# Altium PCB MultiSpikeHoldPCB.PcbDoc
Units mm, origin at the board's own origin, x right, y up, seen from the top; angles counter-clockwise.
Board outline 89.1 x 92.94 mm, 2 copper layers (Top Layer, Bottom Layer), stack 0.071 mm thick; 101 components, 74 nets, 364 pads, 4 vias.
Unrouted connection lines stored in the file: 182.
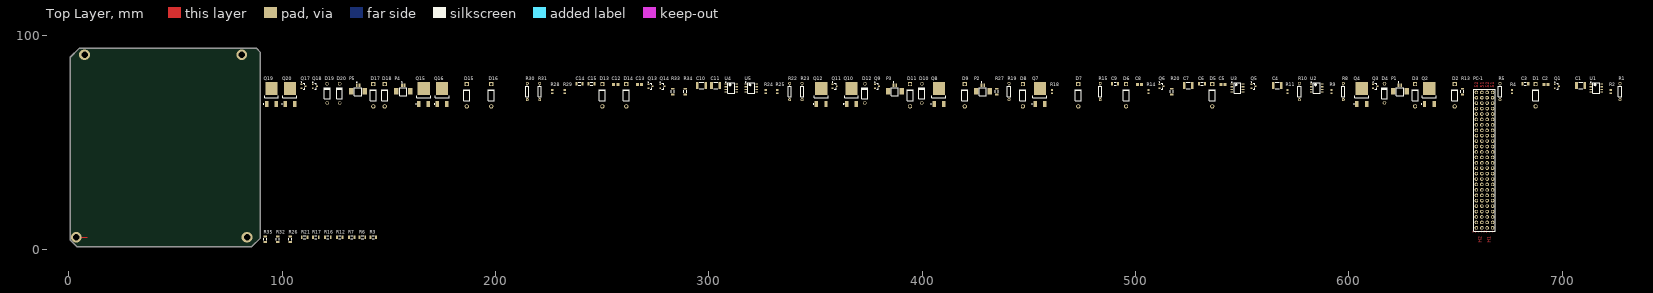
[diagram p0: Top Layer view]
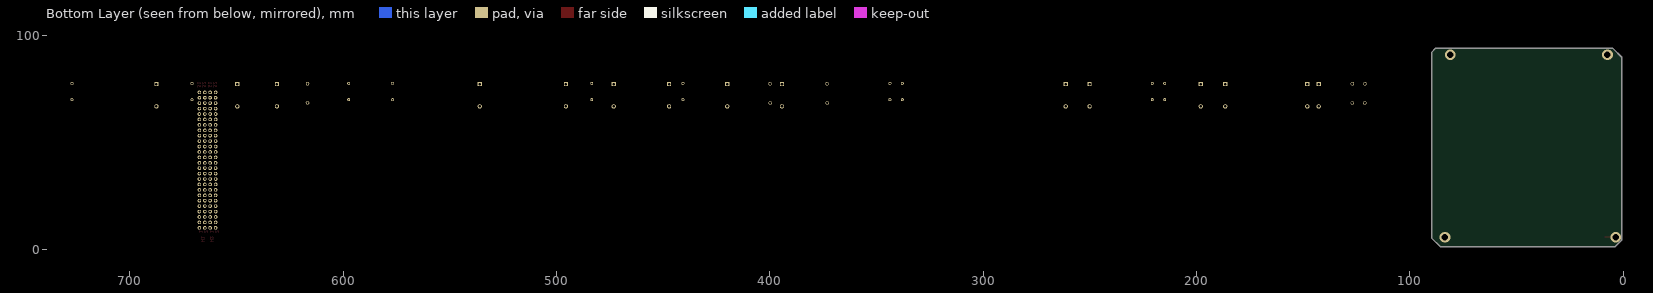
[diagram p1: Bottom Layer view, seen from below]

## Layer stack, top to bottom
Top Solder: solder mask 0.0102, Solder Resist, Dk 3.5
Top Layer: signal copper 0.0356
Bottom Layer: signal copper 0.0356
Bottom Solder: solder mask 0.0102, Solder Resist, Dk 3.5

## Board outline
4.775,94.056 0.686,89.967 0.686,4.216 3.708,1.194 3.734,1.168 84.506,1.168 85.7,1.168 89.789,5.258 89.789,91.821 89.789,92.202 87.884,94.107 87.833,94.056 4.801,94.056

## Design rules (kind name [scope] priority, off if disabled: settings)
Clearance [All] p1: gap=0.254 ignorepadtopadclearanceinfootprint=FALSE except(0: Arc-Hole Track-Hole SMDPad-Hole THPad-Hole Via-Hole Fill-Hole Poly-Hole Region-Hole Text-Hole; 0.127: Track-Track Track-SMDPad Track-THPad SMDPad-SMDPad SMDPad-THPad THPad-THPad)
HoleSize [All] p1: absolutevalues=TRUE maxlimit=3.048 minlimit=0.025 maxpercent=80.000 minpercent=20.000
MinimumSolderMaskSliver [All] p1: minsoldermaskwidth=0.127
PlaneConnect [All] p1: planeconnectstyle=Direct reliefexpansion=0.508 reliefentries=4 reliefconductorwidth=0.254 reliefairgap=0.254
PolygonConnect [All] p1: connectstyle=Direct reliefconductorwidth=0.254 reliefentries=4 polygonreliefangle="90 Angle" airgapwidth=0.254
RoomDefinition MultiSpikeHoldSchem [InComponentClass('MultiSpikeHoldSchem')] p1: confinementstyle=ConfineIn formatcopy=TRUE lockcomponents=FALSE outline 90.932,2.591 729.488,2.591 729.488,81.153 90.932,81.153
RoutingVias [All] p1: holewidth=0.711 width=1.27 viastyle="Through Hole" minholewidth=0.711 minwidth=1.27 maxholewidth=0.711 maxwidth=1.27
SolderMaskExpansion [All] p1: expansion=0.102
Width [All] p1: maxlimit=0.559 minlimit=0.305 preferedwidth=0.33
27 further rules are at their usual default settings.

## Classes and differential pairs
component class MultiSpikeHoldSchem: C1 C2 C3 C4 C5 C6 C8 C9 C10 C11 C12 D1 D2 D3 D4 D5 D6 D7 D8 D9 D10 D11 D12 D13 D14 D15 D16 P1 P2 P4 PC-1 Q1 Q2 Q3 Q4 Q5 Q6 Q7 Q8 Q9 Q10 Q11 Q12 Q13 Q14 Q15 Q16 R1 R2 R3 R4 R5 R6 R7 R8 R9 R10 R11 R13 R14 R15 R18 R19 R20 R22 R23 R24 R25 R27 R28 R33 R34 U1 U2 U3 U4

## Components (designator, comment, footprint, x,y, rotation, side; value= is the part's Value field where it differs from the comment)
C1 "CAP 680pF 50V" CAPC1812(4532)230_L 708.685,76.708 r0 top value=680pF
C2 "0.01uF" CAPC2013X70X45ML10T25 692.531,77.19 r0 top
C3 "1uF" CAPC1206(3216)110_L 682.726,77.495 r0 top
C4 "CAP 680pF 50V" CAPC1812(4532)230_L 566.471,76.708 r0 top value=680pF
C5 "0.01uF" CAPC2013X70X45ML10T25 540.969,77.19 r0 top
C6 "1uF" CAPC1206(3216)110_L 531.19,77.495 r0 top
C7 "CAP 680pF 50V" CAPC1812(4532)230_L 524.738,76.708 r0 top value=680pF
C8 "0.01uF" CAPC2013X70X45ML10T25 501.828,77.19 r0 top
C9 "1uF" CAPC1206(3216)110_L 490.499,77.495 r0 top
C10 "CAP 680pF 50V" CAPC1812(4532)230_L 296.57,76.708 r0 top value=680pF
C11 "CAP 680pF 50V" CAPC1812(4532)230_L 303.2,76.708 r0 top value=680pF
C12 "0.01uF" CAPC2013X70X45ML10T25 256.362,77.19 r0 top
C13 "0.01uF" CAPC2013X70X45ML10T25 267.563,77.19 r0 top
C14 "1uF" CAPC1206(3216)110_L 239.446,77.495 r0 top
C15 "1uF" CAPC1206(3216)110_L 245.034,77.495 r0 top
D1 "Diode 1N4005" DO-41 687.552,72.136 r90 top
D2 "Diode 1N4005" DO-41 649.63,72.136 r90 top
D3 "Diode 1N4005" DO-41 631.063,72.136 r90 top
D4 "1N4757A" FAIR-DO-41-2_V 616.737,73.025 r90 top
D5 "Diode 1N4005" DO-41 535.991,72.136 r90 top
D6 "Diode 1N4005" DO-41 495.579,72.136 r90 top
D7 "Diode 1N4005" DO-41 473.202,72.136 r90 top
D8 "Diode 1N4005" DO-41 447.243,72.136 r90 top
D9 "Diode 1N4005" DO-41 419.989,72.136 r90 top
D10 "1N4757A" FAIR-DO-41-2_V 399.872,73.025 r90 top
D11 "Diode 1N4005" DO-41 394.309,72.136 r90 top
D12 "1N4757A" FAIR-DO-41-2_V 373.126,73.025 r90 top
D13 "Diode 1N4005" DO-41 250.114,72.136 r90 top
D14 "Diode 1N4005" DO-41 261.315,72.136 r90 top
D15 "Diode 1N4005" DO-41 186.537,72.136 r90 top
D16 "Diode 1N4005" DO-41 197.993,72.136 r90 top
D17 "Diode 1N4005" DO-41 142.722,72.136 r90 top
D18 "Diode 1N4005" DO-41 148.056,72.136 r90 top
D19 "1N4757A" FAIR-DO-41-2_V 121.056,73.025 r90 top
D20 "1N4757A" FAIR-DO-41-2_V 126.898,73.025 r90 top
P1 "53261-0271" MOLX-53261-0271_V 623.925,75.412 r0 top
P2 "53261-0271" MOLX-53261-0271_V 428.422,75.412 r0 top
P3 "53261-0271" MOLX-53261-0271_V 387.172,75.412 r0 top
P4 "53261-0271" MOLX-53261-0271_V 156.743,75.412 r0 top
P5 "53261-0271" MOLX-53261-0271_V 135.61,75.412 r0 top
PC-1 "PC-104" PC-104FOOTPRINT 667.436,9.982 r90 top
Q1 "MMBTA42LT1G" ONSC-SOT-23-3-318-08_V 697.56,76.327 r0 top
Q2 "MJD127T4G" ONSC-DPAK-3-369C-01_V 637.768,72.441 r90 top
Q3 "MMBTA42LT1G" ONSC-SOT-23-3-318-08_V 612.419,76.327 r0 top
Q4 "MJD122T4G" ONSC-DPAK-3-369C-01_V 606.069,72.441 r90 top
Q5 "MMBTA42LT1G" ONSC-SOT-23-3-318-08_V 555.345,76.327 r0 top
Q6 "MMBTA42LT1G" ONSC-SOT-23-3-318-08_V 512.216,76.327 r0 top
Q7 "MJD127T4G" ONSC-DPAK-3-369C-01_V 455.219,72.441 r90 top
Q8 "MJD127T4G" ONSC-DPAK-3-369C-01_V 407.873,72.441 r90 top
Q9 "MMBTA42LT1G" ONSC-SOT-23-3-318-08_V 378.815,76.327 r0 top
Q10 "MJD122T4G" ONSC-DPAK-3-369C-01_V 366.877,72.441 r90 top
Q11 "MMBTA42LT1G" ONSC-SOT-23-3-318-08_V 358.978,76.327 r0 top
Q12 "MJD122T4G" ONSC-DPAK-3-369C-01_V 352.628,72.441 r90 top
Q13 "MMBTA42LT1G" ONSC-SOT-23-3-318-08_V 272.618,76.327 r0 top
Q14 "MMBTA42LT1G" ONSC-SOT-23-3-318-08_V 278.206,76.327 r0 top
Q15 "MJD127T4G" ONSC-DPAK-3-369C-01_V 166.268,72.441 r90 top
Q16 "MJD127T4G" ONSC-DPAK-3-369C-01_V 174.93,72.441 r90 top
Q17 "MMBTA42LT1G" ONSC-SOT-23-3-318-08_V 109.982,76.327 r0 top
Q18 "MMBTA42LT1G" ONSC-SOT-23-3-318-08_V 115.316,76.327 r0 top
Q19 "MJD122T4G" ONSC-DPAK-3-369C-01_V 94.97,72.441 r90 top
Q20 "MJD122T4G" ONSC-DPAK-3-369C-01_V 103.632,72.441 r90 top
R1 "Res1" AXIAL-0.3 727.151,73.863 r90 top value=2K
R2 "10K" RESC1608X55X25ML10T15 722.833,73.863 r90 top
R3 "330" RESC3116X65X40LL10T20 142.646,5.486 r0 top
R4 "10K" RESC1608X55X25ML10T15 676.478,73.863 r90 top
R5 "Res1" AXIAL-0.3 670.89,73.863 r90 top value=4.7K
R6 "330" RESC3116X65X40LL10T20 137.617,5.486 r0 top
R7 "330" RESC3116X65X40LL10T20 132.588,5.486 r0 top
R8 "Res1" AXIAL-0.3 597.433,73.863 r90 top value=2K
R9 "10K" RESC1608X55X25ML10T15 591.82,73.863 r90 top
R10 "Res1" AXIAL-0.3 576.885,73.863 r90 top value=2K
R11 "10K" RESC1608X55X25ML10T15 571.297,73.863 r90 top
R12 "330" RESC3116X65X40LL10T20 127,5.486 r0 top
R13 "330" RESC3116X65X40LL10T20 653.288,73.863 r90 top
R14 "10K" RESC1608X55X25ML10T15 506.146,73.863 r90 top
R15 "Res1" AXIAL-0.3 483.489,73.863 r90 top value=4.7K
R16 "330" RESC3116X65X40LL10T20 121.412,5.486 r0 top
R17 "330" RESC3116X65X40LL10T20 115.798,5.486 r0 top
R18 "10K" RESC1608X55X25ML10T15 460.857,73.863 r90 top
R19 "Res1" AXIAL-0.3 440.766,73.863 r90 top value=4.7K
R20 "330" RESC3116X65X40LL10T20 517.068,73.863 r90 top
R21 "330" RESC3116X65X40LL10T20 110.464,5.486 r0 top
R22 "Res1" AXIAL-0.3 337.896,73.863 r90 top value=2K
R23 "Res1" AXIAL-0.3 343.738,73.863 r90 top value=2K
R24 "10K" RESC1608X55X25ML10T15 326.695,73.863 r90 top
R25 "10K" RESC1608X55X25ML10T15 332.054,73.863 r90 top
R26 "330" RESC3116X65X40LL10T20 103.733,4.597 r90 top
R27 "330" RESC3116X65X40LL10T20 434.899,73.863 r90 top
R28 "10K" RESC1608X55X25ML10T15 226.568,73.863 r90 top
R29 "10K" RESC1608X55X25ML10T15 232.435,73.863 r90 top
R30 "Res1" AXIAL-0.3 214.884,73.863 r90 top value=4.7K
R31 "Res1" AXIAL-0.3 220.726,73.863 r90 top value=4.7K
R32 "330" RESC3116X65X40LL10T20 97.891,4.597 r90 top
R33 "330" RESC3116X65X40LL10T20 283.057,73.863 r90 top
R34 "330" RESC3116X65X40LL10T20 288.899,73.863 r90 top
R35 "330" RESC3116X65X40LL10T20 92.049,4.597 r90 top
U1 "NE555DR" D0008A_L 716,75.489 r0 top
U2 "NE555DR" D0008A_L 584.987,75.489 r0 top
U3 "NE555DR" D0008A_L 547.802,75.489 r0 top
U4 "NE555DR" D0008A_L 310.515,75.489 r0 top
U5 "NE555DR" D0008A_L 319.862,75.489 r0 top

## Footprints (in the part's own frame and the unit in brackets; to place one, negate y for a bottom-side part, rotate by r counter-clockwise, add the part's x,y. Pads: shape width x height; smd on the part's side, far side on the other; paste and mask are expansions set on the pad)
AXIAL-0.3 [mm] "Axial Device, Thru-Hole; 2 Leads; 0.3 in Pin Spacing"
  round 1.4 hole 0.85: 1(-3.81,0) 2(3.81,0)
  silkscreen extent -2.77,-0.76 2.77,0.76
CAPC1206(3216)110_L [mm] "Chip Capacitor, Body 3.2x1.6mm, Height 1.1mm, IPC High Density"
  rect 0.95x1.7 smd: 1(-1.4,0) 2(1.4,0)
  silkscreen extent -0.55,-0.75 0.55,0.75, body extent -1.7,-0.9 1.7,0.9, height 1.1
CAPC1812(4532)230_L [mm] "Chip Capacitor, Body 4.5x3.2mm, Height 2.3mm, IPC High Density"
  rect 1.2x3.3 smd: 1(-1.95,0) 2(1.95,0)
  silkscreen extent -0.95,-1.55 0.95,1.55, body extent -2.4,-1.7 2.4,1.7, height 2.3
CAPC2013X70X45ML10T25 [mm] "Chip Capacitor, 2-Leads, Body 2.00x1.25mm, IPC Low Density"
  rect 1.4x1.5 smd: 1(-0.95,0) 2(0.95,0)
  body extent -1.05,-0.67 1.05,0.67, height 0.7
D0008A_L [mm] "SOIC, 8-Leads, Body 5x4mm, Pitch 1.27mm, IPC High Density"
  rrect18% 1.25x0.55 smd: 1(-2.625,1.905) 2(-2.625,0.635) 3(-2.625,-0.635) 4(-2.625,-1.905) 5(2.625,-1.905) 6(2.625,-0.635) 7(2.625,0.635) 8(2.625,1.905)
  silkscreen extent -2.75,-2.5 1.6,2.85, body extent -3,-2.45 3,2.45, height 1.63
DO-41 [mm] "Diode, Axial; Body 5.2 x 2.7 mm (LxDia. max), Lead Dia. 0.86 mm (max)"
  round 2 hole 1.2: 1(-5.23,0)
  rect 2x2 hole 1.2: 2(5.23,0)
  silkscreen extent -2.65,-1.4 2.75,1.4
FAIR-DO-41-2_V [mm] "2-Leads, Axial leaded, Body 2.72x5.2mm, Pin Spacing 9mm"
  round 1.65 hole 1.15: 1(-4.5,0) 2(4.5,0)
  silkscreen extent -2.6,-1.36 2.6,1.36, body extent -4.93,-1.36 4.93,1.36, height 2.71
MOLX-53261-0271_V [mm] "Header, 2-Leads, Pitch 1.25mm"
  rect 0.8x1.6 smd: 1(-0.625,1.45) 2(0.625,1.45)
  rect 2.1x3 smd: MP1(-3.175,-1.45) MP2(3.175,-1.45)
  silkscreen extent -1.72,-3.55 1.73,2.92, body extent -3.82,-3.55 3.83,1.65, height 3.41
ONSC-DPAK-3-369C-01_V [mm] "DPAK, 3-Leads, Body 6.54x6.095mm, Pitch 2.29mm"
  rect 3x1.6 smd: 1(-4.4,2.29) 3(-4.4,-2.29)
  rect 6.2x5.8 smd: 4(2.8,0)
  silkscreen extent -4.52,-3.27 -0.45,3.76, body extent -1.6,-3.27 4.49,3.27, height 2.38
ONSC-SOT-23-3-318-08_V [mm] "SOT23, 3-Leads, Body 2.92x1.3mm, Pitch 0.95mm"
  rect 0.9x0.8 smd: 1(-1,0.95) 2(-1,-0.95) 3(1,0)
  silkscreen extent -1.12,-1.46 0.65,2.02, body extent -0.65,-1.46 0.65,1.46, height 1.11
PC-104FOOTPRINT [mm]
  round 1.676 hole 0.914 mask+0.076: H1_1(0,0) H1_2(0,2.54) H1_3(2.54,0) H1_4(2.54,2.54) H1_5(5.08,0) H1_6(5.08,2.54) H1_7(7.62,0) H1_8(7.62,2.54) H1_9(10.16,0) H1_10(10.16,2.54) H1_11(12.7,0) H1_12(12.7,2.54) H1_13(15.24,0) H1_14(15.24,2.54) H1_15(17.78,0) H1_16(17.78,2.54) H1_17(20.32,0) H1_18(20.32,2.54) H1_19(22.86,0) H1_20(22.86,2.54) H1_21(25.4,0) H1_22(25.4,2.54) H1_23(27.94,0) H1_24(27.94,2.54) H1_25(30.48,0) H1_26(30.48,2.54) H1_27(33.02,0) H1_28(33.02,2.54) H1_29(35.56,0) H1_30(35.56,2.54) H1_31(38.1,0) H1_32(38.1,2.54) H1_33(40.64,0) H1_34(40.64,2.54) H1_35(43.18,0) H1_36(43.18,2.54) H1_37(45.72,0) H1_38(45.72,2.54) H1_39(48.26,0) H1_40(48.26,2.54) H1_41(50.8,0) H1_42(50.8,2.54) H1_43(53.34,0) H1_44(53.34,2.54) H1_45(55.88,0) H1_46(55.88,2.54) H1_47(58.42,0) H1_48(58.42,2.54) H1_49(60.96,0) H1_50(60.96,2.54) H1_51(63.5,0) H1_52(63.5,2.54) H2_1(0,5.08) H2_2(0,7.62) H2_3(2.54,5.08) H2_4(2.54,7.62) H2_5(5.08,5.08) H2_6(5.08,7.62) H2_7(7.62,5.08) H2_8(7.62,7.62) H2_9(10.16,5.08) H2_10(10.16,7.62) H2_11(12.7,5.08) H2_12(12.7,7.62) H2_13(15.24,5.08) H2_14(15.24,7.62) H2_15(17.78,5.08) H2_16(17.78,7.62) H2_17(20.32,5.08) H2_18(20.32,7.62) H2_19(22.86,5.08) H2_20(22.86,7.62) H2_21(25.4,5.08) H2_22(25.4,7.62) H2_23(27.94,5.08) H2_24(27.94,7.62) H2_25(30.48,5.08) H2_26(30.48,7.62) H2_27(33.02,5.08) H2_28(33.02,7.62) H2_29(35.56,5.08) H2_30(35.56,7.62) H2_31(38.1,5.08) H2_32(38.1,7.62) H2_33(40.64,5.08) H2_34(40.64,7.62) H2_35(43.18,5.08) H2_36(43.18,7.62) H2_37(45.72,5.08) H2_38(45.72,7.62) H2_39(48.26,5.08) H2_40(48.26,7.62) H2_41(50.8,5.08) H2_42(50.8,7.62) H2_43(53.34,5.08) H2_44(53.34,7.62) H2_45(55.88,5.08) H2_46(55.88,7.62) H2_47(58.42,5.08) H2_48(58.42,7.62) H2_49(60.96,5.08) H2_50(60.96,7.62) H2_51(63.5,5.08) H2_52(63.5,7.62)
  silkscreen extent -1.5,-1.19 65,8.81
RESC1608X55X25ML10T15 [mm] "Chip Resistor, 2-Leads, Body 1.60x0.80mm, IPC Low Density"
  rect 0.8x1 smd: 1(-0.75,0) 2(0.75,0)
  body extent -0.85,-0.45 0.85,0.45, height 0.55
RESC3116X65X40LL10T20 [mm] "Chip Resistor, 2-Leads, Body 3.10x1.60mm, IPC High Density"
  rect 0.85x1.6 smd: 1(-1.325,0) 2(1.325,0)
  silkscreen extent -0.5,-0.7 0.5,0.7, body extent -1.6,-0.85 1.6,0.85, height 0.65

## Part data
C1 C4 C7 C10 C11: library part CMP-1040-00233-1, "CAP 680pF 50V ±5% 1812 (4532 Metric) Thickness 2.3mm SMD", Case-EIA=1812, Case-Metric=4532, Rated Voltage="50 V", Tolerance=±5%, Max Thickness="2.3 mm", Technology=SMT
C2 C5 C8 C12 C13: library part CMP-2000-05013-1, "Chip Capacitor, 10 nF, +/- 10%, 50 V, -55 to 125 degC, 0805 (2012 Metric), RoHS, Tape and Reel", Capacitance - nF=10nF, Capacitance - pF=10000pF, Case Code - in=0805, Case Code - mm=2012, Case Height=0.6mm, Case Length=2mm, Case Width=1.25mm, Dielectric=X7R, Manufacturer=Murata, Maximum Operating Temperature=+125C, Minimum Operating Temperature=-55C, Operating Temperature Range=-55Cto+125C, Package / Case=0805(2012metric), Temperature Coefficient / Code=+/-15%, Tolerance=10%, Voltage Rating=50V, Brand=MurataElectronics, Capacitance=0.01uF, Datasheet URL=https://datasheet.ciiva.com/29201/452521-da-01-en-vs-kondensator-0805-29201121.pdf, Datasheet Version=Dec-10, Dimensions=1.25mmWx2mmLx0.6mmH, Factory Pack Quantity=4000, Manufacturer URL=http://www.murata.com/, Packaging=Reel, Product=GeneralTypeMLCCs, Product Category=MultilayerCeramicCapacitorsMLCC-SMD/SMT, RoHS=Details, Series=GRM, Termination Style=SMD/SMT, Type=GeneralPurposeMLCC, Voltage Rating DC=50V
C3 C6 C9 C14 C15: library part CMP-1037-04718-1, "CAP 1uF 50V ±10% 1206 (3216 Metric) Thickness 1.1mm SMD", Case-EIA=1206, Case-Metric=3216, Rated Voltage="50 V", Tolerance=±10%, Max Thickness="1.1 mm", Technology=SMT
D1 D2 D3 D5 D6 D7 D8 D9 D11 D13 D14 D15 D16 D17 D18: "1 Amp General Purpose Rectifier", Code_JEDEC=DO-204-AL, ComponentLink1Description="Manufacturer Link", ComponentLink1URL=http://www.fairchildsemi.com/, ComponentLink2Description=Datasheet, ComponentLink2URL=http://www.fairchildsemi.com/ds/1N%2F1N4001.pdf, DatasheetVersion=1998, LatestRevisionDate=17-Jul-2002, LatestRevisionNote="Re-released for DXP Platform.", PackageDescription="Diode, Axial; Body 5.2 x 2.7 mm (LxDia. max), Lead Dia. 0.86 mm (max)", PackageReference=DO-41, PackageVersion=Aug-1999, Published=8-Jun-2000, Publisher="Altium Limited"
D4 D10 D12 D19 D20: library part CMP-0892-00018-1, "Zener Diode, 51V, 1W, 5%, -65 to 200 degC, 2-Pin DO-41, Body 2.72 x 5.2 mm, RoHS", Manufacturer="Fairchild Semiconductor", Operating and Storage Temperature Range="-65 to 200 degC", Test Current IZ (mA)=5, Tolerance=5%, ComponentLink1Description="Manufacturer URL", ComponentLink1URL=http://www.fairchildsemi.com/, ComponentLink2Description=Datasheet, ComponentLink2URL=http://www.fairchildsemi.com/ds/1N/1N4744A.pdf, ComponentLink3Description="Package Specification", ComponentLink3URL=http://www.fairchildsemi.com/dwg/DO/DO41A.pdf, DatasheetVersion="Rev. H3", IR (uA)=5, Mounting Technology="Through Hole", PackageDescription="2-Pin Axial leaded, Body 2.72 x 5.2 mm, Lead Spread 25.4 mm", PackageReference=DO-41-2, PackageVersion="Rev. 2", PartNumber=1N4757A, PD (W)=1, RoHS=TRUE, VZ (Max.) (V)=53.55, VZ (Min.) (V)=48.45, ZZ (Max) (ohm)=95
P1 P2 P3 P4 P5: library part CMP-2000-05633-1, "PicoBlade(TM) Header, Right Angle, -40 to 85 degC, 2-Pin SMD, RoHS, Tape and Reel", Current - Max=1A, Manufacturer=Molex, Package Description="2-Leads Header, Pitch 1.25 mm, Mated Height 3.4 mm", Package Version="Rev. H, 11/2014", Voltage - Max=125V, =0532610271, Brand=Molex, Contact Material=PhosphorBronze, Contact Plating=Tin, Current Rating=1A, Datasheet URL=http://www.molex.com/webdocs/datasheets/pdf/en-us/0532610271_PCB_HEADERS.pdf, Datasheet Version=03/2016, Factory Pack Quantity=1000, Housing Material=Thermoplastic, Manufacturer URL=http://www.molex.com/, Mounting Angle=Right, Mounting Style=SMD/SMT, Mounting Technology=SurfaceMount, Number of Positions=2, Number of Positions / Contacts=2, Number of Rows=1, Package Reference=53261-0271, Package URL=http://www.molex.com/pdm_docs/sd/532610271_sd.pdf, Packaging=Reel, Pitch=1.25mm, Product Category=1.25mmConnectors, Product Type=Headers, RoHS=Details, Series=53261, Termination Style=SMD, Tradename=PicoBlade, Type=Shrouded, Voltage Rating=125V
Q1 Q3 Q5 Q6 Q9 Q11 Q13 Q14 Q17 Q18: library part CMP-1048-00662-1, "High Voltage Transistor, NPN Silicon, 3-Pin SOT-23, Pb-Free, Tape and Reel", Manufacturer="On Semiconductor", ComponentLink1Description="Manufacturer URL", ComponentLink1URL=http://www.onsemi.com/, ComponentLink2Description=Datasheet, ComponentLink2URL=http://www.onsemi.cn/pub_link/Collateral/MMBTA42LT1-D.PDF, ComponentLink3Description="Package Specification", ComponentLink3URL=http://www.onsemi.cn/pub_link/Collateral/318-08.PDF, DatasheetVersion="Rev. 12", fT Min (MHz)=50, IC Continuous (A)=0.5, Mounting Technology="Surface Mount", PackageDescription="3-Pin Small Outline Transistor, Body 2.92 x 1.3 mm, Pitch 0.95 mm", PackageReference=SOT-23-3-318-08, PackageVersion="Rev. AP, 11/2009", Packing="Tape and Reel", PartNumber=MMBTA42LT1G, Polarity=NPN, RoHS=TRUE
Q2 Q7 Q8 Q15 Q16: library part CMP-1047-00009-1, "Complementary Darlington Power Transistor, 3-Pin DPAK, Pb-Free, Tape and Reel", Manufacturer="On Semiconductor", ComponentLink1Description="Manufacturer URL", ComponentLink1URL=http://www.onsemi.com/, ComponentLink2Description=Datasheet, ComponentLink2URL=http://www.onsemi.com/pub_link/Collateral/MJD122-D.PDF, ComponentLink3Description="Package Specification", ComponentLink3URL=http://www.onsemi.cn/pub_link/Collateral/369C.PDF, DatasheetVersion="Rev. 13", hFE Max (k)=12, IC Continuous (A)=8, Mounting Technology="Surface Mount", PackageDescription="3-Pin Flange Mount, Body 6.54 x 6.095 mm, Pitch 2.29 mm", PackageReference=DPAK-3-369C-01, PackageVersion="Rev. E, 02/2014", Packing="Tape and Reel", PartNumber=MJD127T4G, Polarity=PNP, RoHS=TRUE
Q4 Q10 Q12 Q19 Q20: library part CMP-1047-00007-1, "Complementary Darlington Power Transistor, 3-Pin DPAK, Pb-Free, Tape and Reel", Manufacturer="On Semiconductor", ComponentLink1Description="Manufacturer URL", ComponentLink1URL=http://www.onsemi.com/, ComponentLink2Description=Datasheet, ComponentLink2URL=http://www.onsemi.com/pub_link/Collateral/MJD122-D.PDF, ComponentLink3Description="Package Specification", ComponentLink3URL=http://www.onsemi.cn/pub_link/Collateral/369C.PDF, DatasheetVersion="Rev. 13", hFE Max (k)=12, IC Continuous (A)=8, Mounting Technology="Surface Mount", PackageDescription="3-Pin Flange Mount, Body 6.54 x 6.095 mm, Pitch 2.29 mm", PackageReference=DPAK-3-369C-01, PackageVersion="Rev. E, 02/2014", Packing="Tape and Reel", PartNumber=MJD122T4G, Polarity=NPN, RoHS=TRUE
R1 R5 R8 R10 R15 R19 R22 R23 R30 R31: "Resistor", LatestRevisionDate=17-Jul-2002, LatestRevisionNote="Re-released for DXP Platform.", PackageDescription="Axial Device, Thru-Hole; 2 Leads; 0.3 in Pin Spacing", PackageReference=AXIAL-0.3, Published=8-Jun-2000, Publisher="Altium Limited"
R2 R4 R9 R11 R14 R18 R24 R25 R28 R29: library part CMP-2100-03664-1, "Chip Resistor, 10 KOhm, +/- 1%, 01 W, -55 to 155 degC, 0603 (1608 Metric), RoHS, Tape and Reel", Case/Package=0603, Case Code (Metric)=1608, Manufacturer=Yageo, Max Operating Temperature=155degC, Min Operating Temperature=-55degC, Package Description="2-Pin Surface Mount Device, Body 1.6 x 0.8 mm", Power Rating=100mW, Resistance=10KOhm, Temperature Coefficient=100ppm/degreesC, Tolerance=1%, Voltage Rating=75V, Voltage Rating (DC)=50V, Case Code (Imperial)=0603, Composition=ThickFilm, Datasheet URL=http://www.yageo.com/NewPortal/yageodocoutput?fileName=/pdf/R-Chip/PYu-RC_Group_51_RoHS_L_5.pdf, Datasheet Version="Rev. 5, 10/2016", Depth=0.8mm, Height=0.45mm, Lead Free=LeadFree, Lead Pitch=0.3mm, Length=1.6mm, Manufacturer URL=http://www.yageo.com/, Military Standard=Not, Number of Pins=2, Package Reference=0603, Packaging=TapeandReel, REACH SVHC=NoSVHC, RoHSCompliant=true, Termination=SMD/SMT, Weight=7.1E-05oz, Width=0.8mm
R3 R6 R7 R12 R13 R16 R17 R20 R21 R26 R27 R32 R33 R34 R35: library part CMP-2000-06969-1, "Chip Resistor, 330 Ohm, +/- 1%, 250 mW, -55 to 155 degC, 1206 (3216 Metric), RoHS, Tape and Reel", Case Code - in=1206, Case Code - mm=3216, Manufacturer=Yageo, Operating Temperature Range=-55Cto+155C, Package Description="2-Pin Surface Mount Device, Body 3.1 x 1.6 mm", Power Rating=250mW(1/4W), Resistance=330Ohms, Temperature Coefficient=100PPM/C, Tolerance=1%, Voltage Rating=200V, Datasheet URL=http://www.yageo.com/documents/recent/PYu-RC_Group_51_RoHS_L_7.pdf, Datasheet Version="Rev. 7, 05/2017", Manufacturer URL=http://www.yageo.com/, Mounting Technology=SurfaceMount, Package Reference=1206, Packaging=Reel, Product=ThickFilmResistorsGeneralPurpose, Series=RC, Termination Style=SMD/SMT
U1 U2 U3 U4 U5: library part CMP-1685-00007-1, "Precision Timer, 4.5 to 16 V, 0 to 70 degC, 8-Pin SOIC (D8), Green (RoHS & no Sb/Br), Tape and Reel", Case\Package=SMA, Forward Current="1 A", Forward Voltage="450 mV", Max Operating Temperature="125 degC", Max Surge Current="30 A", Min Operating Temperature="-55 degC", Package Quantity=1, Peak Reverse Current="500 uA", Code_JEDEC=MS-012, ComponentLink1Description="Manufacturer URL", ComponentLink1URL=http://www.ti.com/, ComponentLink2Description=Datasheet, ComponentLink2URL=http://www.ti.com/general/docs/lit/getliterature.tsp?genericPartNumber=NE555&fileType=pdf, ComponentLink3Description="Package Specification", ComponentLink3URL=http://www.ti.com/lit/ml/msoi002j/msoi002j.pdf, DatasheetVersion="SLFS022I, 09/2014", Height="2.44 mm", Length="4.57 mm", Mount="Surface Mount", PackageDescription="8-Pin Small Outline Integrated Circuit, Body 4.9 x 3.9 mm, Pitch 1.27 mm", PackageReference=D0008A, PackageVersion="4040047-3/M, 06/2011", Packaging="Cut Tape", Pins=2, Radiation Hardening=No, REACH SVHC=Unknown, RoHSCompliant=true, Width="2.84 mm"

## Via types
v1: diameter 5, hole 3.048, Top Layer to Bottom Layer, 4 vias

## Nets (pads, with @x,y where several pads share a name; then routed paths per layer and width w, separated by ;. In a path a pad name is that pad's centre, name@x,y a point inside that pad or via, vN(x,y) a via of type N, cw(c..) or ccw(c..) an arc to the next point about the centre after c; other vN are vias at no path point)
"+ Valve 1": D2.2 D3.2 P1.1 Q2.4
"+ Valve 2": D7.2 D8.2 P2.1 Q7.4
"+ Valve 3": D9.2 D11.2 P3.1 Q8.4
"+ Valve 4": D15.2 D17.2 P5.1 Q15.4
"+ Valve 5": D16.2 D18.2 P4.1 Q16.4
"- Valve 1": D4.2 P1.2 Q4.4
"- Valve 2": D10.2 P2.2 Q10.4
"- Valve 3": D12.2 P3.2 Q12.4
"- Valve 4": D19.2 P5.2 Q19.4
"- Valve 5": D20.2 P4.2 Q20.4
GND: C2.1 C3.1 C5.1 C6.1 C8.1 C12.1 C13.1 C14.1 C15.1 D1.1 D5.1 D6.1 D13.1 D14.1 PC-1.H2_29 Q1.2 Q3.2 Q4.3 Q5.2 Q6.2 Q9.2 Q10.3 Q11.2 Q12.3 Q13.2 Q14.2 Q17.2 Q18.2 Q19.3 Q20.3 U1.1 U2.1 U3.1 U4.1 U5.1
NetC1_2: C1.2 R3.1
NetC2_2: C2.2 U1.5
NetC3_2: C3.2 R1.2 U1.6 U1.7
NetC4_2: C4.2 R12.1
NetC5_2: C5.2 U2.5
NetC6_2: C6.2 R8.2 U2.6 U2.7
NetC7_2: C7.2 R13.1
NetC8_2: C8.2 U3.5
NetC9_2: C9.2 R10.2 U3.6 U3.7
NetC10_2: C10.2 R26.1
NetC11_2: C11.2 R27.1
NetC12_2: C12.2 U4.5
NetC13_2: C13.2 U5.5
NetC14_2: C14.2 R22.2 U4.6 U4.7
NetC15_2: C15.2 R23.2 U5.6 U5.7
NetD1_2: D1.2 Q1.1 R3.2
NetD3_1: D3.1 D4.1
NetD5_2: D5.2 Q5.1 R12.2
NetD6_2: D6.2 Q6.1 R13.2
NetD8_1: D8.1 D10.1
NetD11_1: D11.1 D12.1
NetD13_2: D13.2 Q13.1 R26.2
NetD14_2: D14.2 Q14.1 R27.2
NetD17_1: D17.1 D19.1
NetD18_1: D18.1 D20.1
NetQ1_3: Q1.3 R2.2 U1.2
NetQ2_1: Q2.1 R5.2
NetQ3_1: Q3.1 R7.1
NetQ3_3: Q3.3 R4.1 R5.1
NetQ4_1: Q4.1 R6.1
NetQ5_3: Q5.3 R9.1 U2.2
NetQ6_3: Q6.3 R11.2 U3.2
NetQ7_1: Q7.1 R15.2
NetQ8_1: Q8.1 R19.2
NetQ9_1: Q9.1 R17.1
NetQ9_3: Q9.3 R14.2 R15.1
NetQ10_1: Q10.1 R16.1
NetQ11_1: Q11.1 R21.1
NetQ11_3: Q11.3 R18.2 R19.1
NetQ12_1: Q12.1 R20.1
NetQ13_3: Q13.3 R24.2 U4.2
NetQ14_3: Q14.3 R25.2 U5.2
NetQ15_1: Q15.1 R30.2
NetQ16_1: Q16.1 R31.2
NetQ17_1: Q17.1 R34.1
NetQ17_3: Q17.3 R28.1 R30.1
NetQ18_1: Q18.1 R35.1
NetQ18_3: Q18.3 R29.1 R31.1
NetQ19_1: Q19.1 R32.1
NetQ20_1: Q20.1 R33.1
NetR7_2: R7.2 U1.3
NetR17_2: R17.2 U2.3
NetR21_2: R21.2 U3.3
NetR34_2: R34.2 U4.3
NetR35_2: R35.2 U5.3
"Signal + 1": C1.1 PC-1.H1_3 R6.2
"Signal + 2": C4.1 R16.2
"Signal + 3": C7.1 PC-1.H1_5 R20.2
"Signal + 4": C10.1 R32.2
"Signal + 5": C11.1 PC-1.H1_7 R33.2
V1: PC-1.H1_21 Q2.3 Q7.3 Q8.3 Q15.3 Q16.3 R4.2 R14.1 R18.1 R28.2 R29.2
V2: D2.1 D7.1 D9.1 D15.1 D16.1 PC-1.H1_52
Vcc: PC-1.H1_51 R1.1 R2.1 R8.1 R9.2 R10.1 R11.1 R22.1 R23.1 R24.1 R25.1 U1.4 U1.8 U2.4 U2.8 U3.4 U3.8 U4.4 U4.8 U5.4 U5.8
pads on no net: C9.1 P1.MP1 P1.MP2 P2.MP1 P2.MP2 P3.MP1 P3.MP2 P4.MP1 P4.MP2 P5.MP1 P5.MP2 PC-1.H1_1 PC-1.H1_2 PC-1.H1_4 PC-1.H1_6 PC-1.H1_8 PC-1.H1_9 PC-1.H1_10 PC-1.H1_11 PC-1.H1_12 PC-1.H1_13 PC-1.H1_14 PC-1.H1_15 PC-1.H1_16 PC-1.H1_17 PC-1.H1_18 PC-1.H1_19 PC-1.H1_20 PC-1.H1_22 PC-1.H1_23 PC-1.H1_24 PC-1.H1_25 PC-1.H1_26 PC-1.H1_27 PC-1.H1_28 PC-1.H1_29 PC-1.H1_30 PC-1.H1_31 PC-1.H1_32 PC-1.H1_33 PC-1.H1_34 PC-1.H1_35 PC-1.H1_36 PC-1.H1_37 PC-1.H1_38 PC-1.H1_39 PC-1.H1_40 PC-1.H1_41 PC-1.H1_42 PC-1.H1_43 PC-1.H1_44 PC-1.H1_45 PC-1.H1_46 PC-1.H1_47 PC-1.H1_48 PC-1.H1_49 PC-1.H1_50 PC-1.H2_1 PC-1.H2_2 PC-1.H2_3 PC-1.H2_4 PC-1.H2_5 PC-1.H2_6 PC-1.H2_7 PC-1.H2_8 PC-1.H2_9 PC-1.H2_10 PC-1.H2_11 PC-1.H2_12 PC-1.H2_13 PC-1.H2_14 PC-1.H2_15 PC-1.H2_16 PC-1.H2_17 PC-1.H2_18 PC-1.H2_19 PC-1.H2_20 PC-1.H2_21 PC-1.H2_22 PC-1.H2_23 PC-1.H2_24 PC-1.H2_25 PC-1.H2_26 PC-1.H2_27 PC-1.H2_28 PC-1.H2_30 PC-1.H2_31 PC-1.H2_32 PC-1.H2_33 PC-1.H2_34 PC-1.H2_35 PC-1.H2_36 PC-1.H2_37 PC-1.H2_38 PC-1.H2_39 PC-1.H2_40 PC-1.H2_41 PC-1.H2_42 PC-1.H2_43 PC-1.H2_44 PC-1.H2_45 PC-1.H2_46 PC-1.H2_47 PC-1.H2_48 PC-1.H2_49 PC-1.H2_50 PC-1.H2_51 PC-1.H2_52
copper on no net: | length 5.2
  Top Layer w0.33: v1(3.526,5.479) 8.679,5.479
  other v1: 83.526,5.479 7.326,91.179 81.026,91.179

## Silkscreen, mask and mechanical layers (free items; w line width, h text height)
Mechanical 2:
  lines w0.762: 0.305,4.216 ccw(c0.686,4.216) 0.416,3.947 ; 0.305,4.216 ccw(c0.686,4.216) 0.417,3.947 ; 0.305,4.216 0.305,89.967 ; 0.305,89.967 cw(c0.686,89.967) 0.417,90.237 ; 0.305,89.967 cw(c0.686,89.967) 0.416,90.236 0.417,90.237 ; 0.416,3.947 0.417,3.947 ; 0.417,3.947 3.439,0.925 ; 0.417,90.237 4.505,94.325 ; 3.439,0.924 ccw(c3.708,1.194) 3.439,0.924 ; 3.439,0.925 ccw(c3.708,1.194) 3.439,0.924 ; 3.439,0.925 3.439,0.924 ; 3.439,0.924 3.439,0.924 ; 3.439,0.924 3.464,0.899 ; 3.464,0.899 ccw(c3.734,1.168) 3.734,0.787 ; 3.464,0.899 ccw(c3.734,1.168) 3.734,0.787 ; 3.464,0.899 3.464,0.899 ; 3.734,0.787 84.506,0.787 85.7,0.787 ; 4.506,94.326 cw(c4.775,94.056) 4.775,94.437 ; 4.505,94.325 cw(c4.775,94.056) 4.775,94.437 ; 4.505,94.325 4.506,94.326 ; 4.775,94.437 4.801,94.437 87.694,94.437 ; 85.7,0.787 ccw(c85.7,1.168) 85.969,0.899 85.969,0.899 ; 85.7,0.787 ccw(c85.7,1.168) 85.969,0.899 ; 85.969,0.899 90.058,4.988 ; 87.694,94.437 cw(c87.884,94.107) 88.154,94.376 ; 87.694,94.437 cw(c87.884,94.107) 88.153,94.376 88.154,94.376 ; 88.154,94.376 90.058,92.472 ; 90.058,4.988 ccw(c89.789,5.258) 90.17,5.258 ; 90.058,4.988 ccw(c89.789,5.258) 90.17,5.258 ; 90.058,4.988 90.058,4.988 ; 90.058,92.472 cw(c89.789,92.202) 90.17,92.202 ; 90.058,92.472 90.058,92.471 cw(c89.789,92.202) 90.17,92.202 ; 90.17,5.258 90.17,91.821 90.17,92.202
Drill Drawing:
  text ".Legend" at 69.215,5.944 h1.52

## Dimensions
0.417,90.237 to 90.17,92.202 on Dimensions

## Text inside footprints (layer, text, board x,y; h text height)
PC-1: Mechanical 1 "J1" at 663.542,49.389 h0.76 r90; Top Layer "52" at 660.736,75.582 h1.52 r90; Top Layer "51" at 663.236,75.582 h1.52 r90; Top Layer "52" at 665.736,75.682 h1.52 r90; Top Layer "51" at 668.236,75.682 h1.52 r90; Top Layer "2" at 659.816,7.442 h1.52 r90; Top Layer "1" at 662.356,7.442 h1.52 r90; Top Layer "2" at 664.896,7.442 h1.52 r90; Top Layer "1" at 667.436,7.442 h1.52 r90; Top Layer "H2" at 662.436,2.982 h1.52 r90; Top Layer "H1" at 666.436,2.982 h1.52 r90